# Altium PCB Radar_Connector.PcbDoc
Units mm, origin at the board's own origin, x right, y up, seen from the top; angles counter-clockwise.
Board outline 21.59 x 20.32 mm, 2 copper layers (Top Layer, Bottom Layer); 2 components, 5 nets, 16 pads, 0 vias.
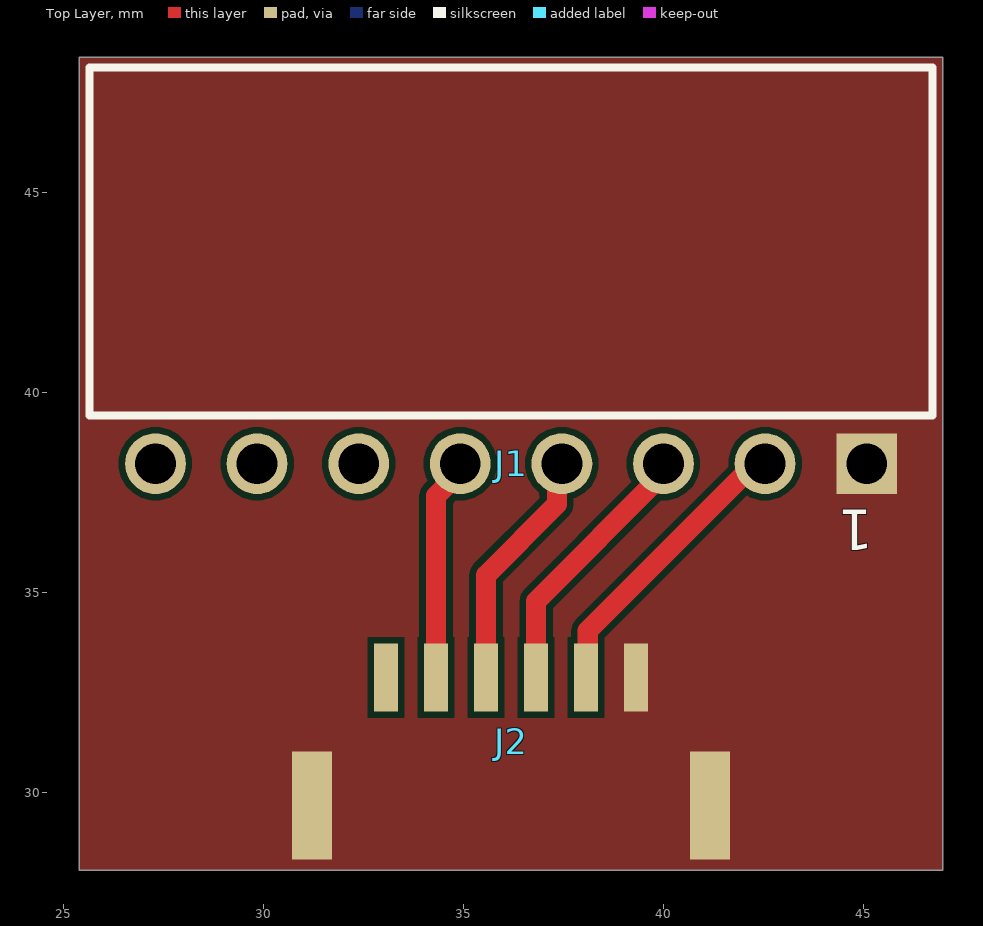
[diagram p0: Top Layer view]
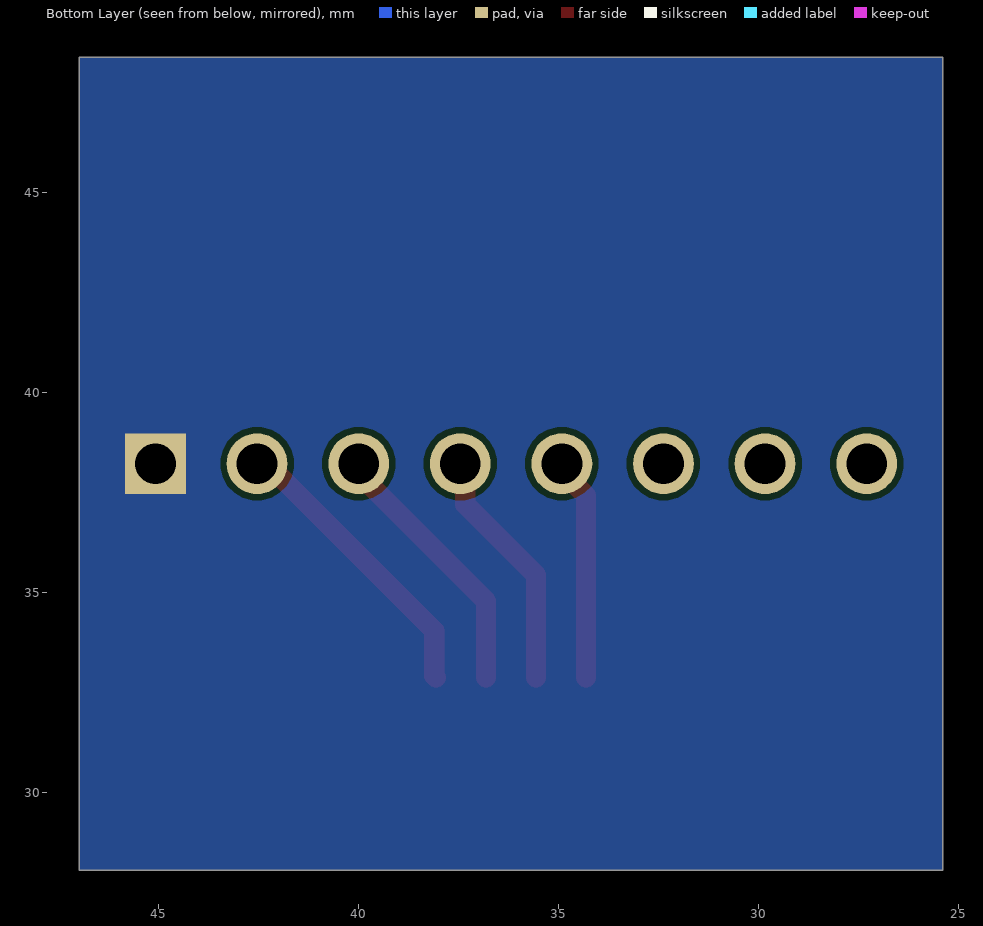
[diagram p1: Bottom Layer view, seen from below]

## Layer stack, top to bottom
Top Solder: solder mask 0.0102, Solder Resist, Dk 3.5
Top Layer: signal copper 0.0356
Dielectric 1: dielectric 0.32, FR-4, Dk 4.8
Bottom Layer: signal copper 0.0356
Bottom Solder: solder mask 0.0102, Solder Resist, Dk 3.5

## Board outline
25.4,28.067 46.99,28.067 46.99,48.387 25.4,48.387

## Design rules (kind name [scope] priority, off if disabled: settings)
Clearance [All] p1: gap=0.152 ignorepadtopadclearanceinfootprint=FALSE except(0: Arc-Hole Track-Hole SMDPad-Hole THPad-Hole Via-Hole Fill-Hole Poly-Hole Region-Hole Text-Hole)
ComponentClearance [All] p1: gap=0.254 collisioncheckmode=3 verticalgap=0.254 showdistances=TRUE
HoleSize [All] p1: absolutevalues=TRUE maxlimit=5.08 minlimit=0.3 maxpercent=80.000 minpercent=20.000
HoleToHoleClearance [All] p1: gap=0.55 allowstackedmicrovias=TRUE
MinimumSolderMaskSliver [All] p1: minsoldermaskwidth=0.152
PasteMaskExpansion [All] p1: expansion=0.152
PlaneConnect [All] p1: planeconnectstyle=Direct reliefexpansion=0.508 reliefentries=4 reliefconductorwidth=0.254 reliefairgap=0.254
PolygonConnect [All] p1: connectstyle=Direct reliefconductorwidth=0.254 reliefentries=4 polygonreliefangle="90 Angle" airgapwidth=0.254
RoutingTopology [All] p1: topology=Daisy_Balanced
RoutingVias [All] p1: holewidth=0.305 width=0.61 viastyle="Through Hole" minholewidth=0.305 minwidth=0.61 maxholewidth=1.27 maxwidth=2.54
SilkToSilkClearance [All] p1: silktosilkclearance=0.152
SilkToSolderMaskClearance [IsPad] p1: minsilkscreentomaskgap=0.152 clearancetoexposedcopper=TRUE
SolderMaskExpansion [All] p1: expansion=0.152 istentingtop=FALSE
Width [All] p1: maxlimit=2.54 minlimit=0.152 preferedwidth=0.254
21 further rules are at their usual default settings.

## Components (designator, comment, footprint, x,y, rotation, side; value= is the part's Value field where it differs from the comment)
J1 "613008143121" 613008143121 36.195,43.777 r180 top
J2 "SM06B-GHS-TB__LF__SN_" SM06BGHSTBLFSN 36.195,30.607 r0 top

## Footprints (in the part's own frame and the unit in brackets; to place one, negate y for a bottom-side part, rotate by r counter-clockwise, add the part's x,y. Pads: shape width x height; smd on the part's side, far side on the other; paste and mask are expansions set on the pad)
613008143121 [mm] "Socket Header, Pitch 2.54 mm, THT, Angled, single row, 18p"
  rect 1.52x1.52 hole 1.02: 1(-8.89,5.55)
  round 1.52 hole 1.02: 2(-6.35,5.55) 3(-3.81,5.55) 4(-1.27,5.55) 5(1.27,5.55) 6(3.81,5.55) 7(6.35,5.55) 8(8.89,5.55)
  silkscreen extent -10.54,-4.35 10.54,4.35, body extent -10.41,-4.25 10.41,5.75, height 2.55
SM06BGHSTBLFSN [mm]
  rect 0.6x1.7 smd: 1(3.125,2.275) 2(1.875,2.275) 3(0.625,2.275) 4(-0.625,2.275) 5(-1.875,2.275) 6(-3.125,2.275)
  rect 1x2.7 smd: MP1(4.975,-0.925) MP2(-4.975,-0.925)
  body extent -5.38,-2.16 5.38,2.69, height 4.27

## Part data
J1: "WR-PHD Socket Header, THT, pitch 2.54mm, Single Row, Angled, 8pin", Contact Resistance=20mOhm, Operating Temperature="-40 to +125degC", Rated Current=3A, Withstanding Voltage=500VAC, Working Voltage=250VAC, ComponentLink1Description=Manufacturer, ComponentLink1URL=http://www.we-online.de, ComponentLink2Description=Datasheet, ComponentLink2URL=https://katalog.we-online.de/em/datasheet/6130xx143121.pdf, Gender=Female, Mounting Technology=THT, Orientation=Angled, Packaging=Tray, Part Number=613008143121, Pin Number=8, Pitch=2.54mm, Published Date="June 2019", Publisher="Wurth Elektronik", Row Number=Single
J2: "Conn Shrouded Header HDR 6 POS 1.25mm Solder RA Side Entry SMD T/R   Source:  Datasheet", Manufacturer_Name="JST (JAPAN SOLDERLESS TERMINALS)", Manufacturer_Part_Number="SM06B-GHS-TB (LF)(SN)", Arrow_Part_Number="SM06B-GHS-TB (LF)(SN)", Arrow_Price-Stock=https://www.arrow.com/en/products/sm06b-ghs-tb-lf-sn/jst-manufacturing, DeviceSetName=SM06B-GHS-TB__LF__SN_, GateName_1=G$1, Height=4.25mm, LibraryName=SM06B-GHS-TB__LF__SN_, SymbolName_1=SM06B-GHS-TB__LF__SN_

## Nets (pads, with @x,y where several pads share a name; then routed paths per layer and width w, separated by ;. In a path a pad name is that pad's centre, name@x,y a point inside that pad or via, vN(x,y) a via of type N, cw(c..) or ccw(c..) an arc to the next point about the centre after c; other vN are vias at no path point)
DOUT: J1.2 J2.2 | length 7.3
  Top Layer w0.508: J2.2 38.114,32.926 38.114,34.05 42.291,38.227 J1.2
GND: J1.1 J2.1 J2.MP1 J2.MP2
RX: J1.4 J2.4 | length 6.1
  Top Layer w0.508: J2.4 35.57,35.443 37.341,37.214 37.341,38.103 J1.4
TX: J1.5 J2.5 | length 5.6
  Top Layer w0.508: J2.5 34.32,37.423 34.925,38.028 J1.5
VDD: J1.3 J2.3 | length 6.7
  Top Layer w0.508: J2.3 36.82,34.788 40.005,37.973 J1.3
pads on no net: J1.6 J1.7 J1.8 J2.6

## Polygon pours and split planes (outlines as drawn)
GND on Bottom Layer "GND-BottomLayer" (solid, pour order 1): 25.4,28.067 46.99,28.067 46.99,48.387 25.4,48.387
GND on Top Layer "GND-TopLayer" (solid, pour order 0): 25.4,28.067 46.99,28.067 46.99,48.387 25.4,48.387

## Silkscreen, mask and mechanical layers (free items; w line width, h text height)
Mechanical 1:
  the board outline again, w0.1

## Text inside footprints (layer, text, board x,y; h text height)
J1: Top Overlay "1" at 45.245,37.077 h1.02 r180